# Altium PCB 12 array vscore.PcbDoc
Units mm, origin at the board's own origin, x right, y up, seen from the top; angles counter-clockwise.
Board outline 8.3 x 5.8 mm, 2 copper layers (Top Layer, Bottom Layer); 5 components, 2 nets, 50 pads, 50 vias.
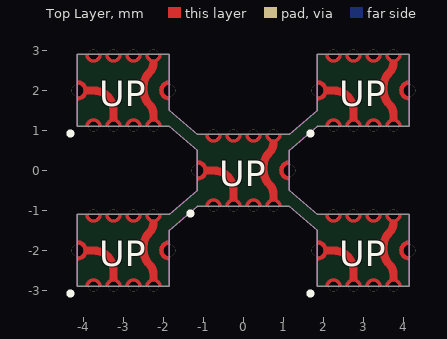
[diagram p0: Top Layer view]
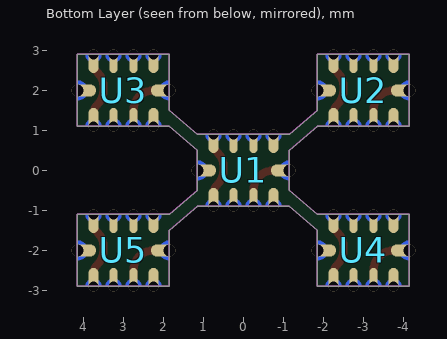
[diagram p1: Bottom Layer view, seen from below]

## Layer stack, top to bottom
Top Solder: solder mask 0.0102, Solder Resist, Dk 3.5
Top Layer: signal copper 0.0356
Dielectric 1: dielectric 0.32, FR-4, Dk 4.8
Bottom Layer: signal copper 0.0356
Bottom Solder: solder mask 0.0102, Solder Resist, Dk 3.5

## Board outline
-1.85,-2.9 -1.85,-1.5 -1.15,-0.9 1.15,-0.9 1.85,-1.5 1.85,-2.9 4.15,-2.9 4.15,-1.1 1.85,-1.1 1.15,-0.5 1.15,0.5 1.85,1.1 4.15,1.1 4.15,2.9 1.85,2.9 1.85,1.5 1.15,0.9 -1.15,0.9 -1.85,1.5 -1.85,2.9 -4.15,2.9 -4.15,1.1 -1.85,1.1 -1.15,0.5 -1.15,-0.5 -1.85,-1.1 -4.15,-1.1 -4.15,-2.9

## Design rules (kind name [scope] priority, off if disabled: settings)
Clearance [All] p1: gap=0.152 ignorepadtopadclearanceinfootprint=FALSE except(0: Arc-Hole Track-Hole SMDPad-Hole THPad-Hole Via-Hole Fill-Hole Poly-Hole Region-Hole Text-Hole)
MinimumSolderMaskSliver [All] p1 off: minsoldermaskwidth=0.254
PolygonConnect [All] p1: connectstyle=Direct reliefconductorwidth=0.254 reliefentries=4 polygonreliefangle="90 Angle" airgapwidth=0.254
RoutingVias [All] p1: holewidth=0.711 width=1.27 viastyle="Through Hole" minholewidth=0.2 minwidth=0.45 maxholewidth=0.711 maxwidth=1.27
SilkToSilkClearance [All] p1 off: silktosilkclearance=0.254
SilkToSolderMaskClearance [IsPad] p1 off: minsilkscreentomaskgap=0.254 clearancetoexposedcopper=TRUE
SolderMaskExpansion [All] p1: expansion=0.102 istentingtop=FALSE
Width [All] p1: maxlimit=5.08 minlimit=0.152 preferedwidth=0.254 minimp=50.000000 maximp=50.000000 favimp=50.000000
27 further rules are at their usual default settings.

## Components (designator, comment, footprint, x,y, rotation, side; value= is the part's Value field where it differs from the comment)
U1 "FAKE_ANALOG_SWITCH" SMTPCB-SPOOF-UFQFN-10 0,0 r90 top
U2 "FAKE_ANALOG_SWITCH" SMTPCB-SPOOF-UFQFN-10 -3,2 r90 top (schematic designator U1)
U3 "FAKE_ANALOG_SWITCH" SMTPCB-SPOOF-UFQFN-10 3,2 r90 top (schematic designator U1)
U4 "FAKE_ANALOG_SWITCH" SMTPCB-SPOOF-UFQFN-10 -3,-2 r90 top (schematic designator U1)
U5 "FAKE_ANALOG_SWITCH" SMTPCB-SPOOF-UFQFN-10 3,-2 r90 top (schematic designator U1)

## Footprints (in the part's own frame and the unit in brackets; to place one, negate y for a bottom-side part, rotate by r counter-clockwise, add the part's x,y. Pads: shape width x height; smd on the part's side, far side on the other; paste and mask are expansions set on the pad)
SMTPCB-SPOOF-UFQFN-10 [mm] "QFN, 10-Leads, Body 1.50x2.00mm, Pitch 0.50mm, IPC High Density"
  oval 0.58x0.25 smd far side: 1(-0.725,0.75) 4(-0.725,-0.75) 6(0.725,-0.75) 9(0.725,0.75)
  oval 0.58x0.2 smd far side: 2(-0.725,0.25) 3(-0.725,-0.25) 7(0.725,-0.25) 8(0.725,0.25)
  oval 0.3x0.58 smd far side: 5(0,-0.975) 10(0,0.975)
  Multi-Layer region: -0.25,-1.15 -0.15,-1.15 -0.139,-1.093 -0.106,-1.044 -0.057,-1.011 0,-1 0,-1 0.057,-1.011 0.106,-1.044 0.139,-1.093 0.15,-1.15 0.15,-1.15 0.25,-1.15 0.231,-1.054 0.177,-0.973 0.096,-0.919 0,-0.9 0,-0.9 -0.096,-0.919 -0.177,-0.973 -0.231,-1.054 -0.25,-1.15
  Multi-Layer region: 0.9,-0.05 0.9,-0.15 0.862,-0.158 0.829,-0.179 0.808,-0.212 0.8,-0.25 0.8,-0.25 0.808,-0.288 0.829,-0.321 0.862,-0.342 0.9,-0.35 0.9,-0.35 0.9,-0.45 0.823,-0.435 0.759,-0.391 0.715,-0.327 0.7,-0.25 0.7,-0.25 0.715,-0.173 0.759,-0.109 0.823,-0.065 0.9,-0.05
  Multi-Layer region: -0.9,0.95 -0.9,0.85 -0.862,0.842 -0.829,0.821 -0.808,0.788 -0.8,0.75 -0.8,0.75 -0.808,0.712 -0.829,0.679 -0.862,0.658 -0.9,0.65 -0.9,0.65 -0.9,0.55 -0.823,0.565 -0.759,0.609 -0.715,0.673 -0.7,0.75 -0.7,0.75 -0.715,0.827 -0.759,0.891 -0.823,0.935 -0.9,0.95
  Multi-Layer region: -0.9,0.45 -0.9,0.35 -0.862,0.342 -0.829,0.321 -0.808,0.288 -0.8,0.25 -0.8,0.25 -0.808,0.212 -0.829,0.179 -0.862,0.158 -0.9,0.15 -0.9,0.15 -0.9,0.05 -0.823,0.065 -0.759,0.109 -0.715,0.173 -0.7,0.25 -0.7,0.25 -0.715,0.327 -0.759,0.391 -0.823,0.435 -0.9,0.45
  Multi-Layer region: -0.9,-0.05 -0.9,-0.15 -0.862,-0.158 -0.829,-0.179 -0.808,-0.212 -0.8,-0.25 -0.8,-0.25 -0.808,-0.288 -0.829,-0.321 -0.862,-0.342 -0.9,-0.35 -0.9,-0.35 -0.9,-0.45 -0.823,-0.435 -0.759,-0.391 -0.715,-0.327 -0.7,-0.25 -0.7,-0.25 -0.715,-0.173 -0.759,-0.109 -0.823,-0.065 -0.9,-0.05
  Multi-Layer region: -0.9,-0.55 -0.9,-0.65 -0.862,-0.658 -0.829,-0.679 -0.808,-0.712 -0.8,-0.75 -0.8,-0.75 -0.808,-0.788 -0.829,-0.821 -0.862,-0.842 -0.9,-0.85 -0.9,-0.85 -0.9,-0.95 -0.823,-0.935 -0.759,-0.891 -0.715,-0.827 -0.7,-0.75 -0.7,-0.75 -0.715,-0.673 -0.759,-0.609 -0.823,-0.565 -0.9,-0.55
  Multi-Layer region: 0.25,1.15 0.15,1.15 0.139,1.093 0.106,1.044 0.057,1.011 0,1 0,1 -0.057,1.011 -0.106,1.044 -0.139,1.093 -0.15,1.15 -0.15,1.15 -0.25,1.15 -0.231,1.054 -0.177,0.973 -0.096,0.919 0,0.9 0,0.9 0.096,0.919 0.177,0.973 0.231,1.054 0.25,1.15
  Multi-Layer region: 0.9,0.95 0.9,0.85 0.862,0.842 0.829,0.821 0.808,0.788 0.8,0.75 0.8,0.75 0.808,0.712 0.829,0.679 0.862,0.658 0.9,0.65 0.9,0.65 0.9,0.55 0.823,0.565 0.759,0.609 0.715,0.673 0.7,0.75 0.7,0.75 0.715,0.827 0.759,0.891 0.823,0.935 0.9,0.95
  Multi-Layer region: 0.9,0.45 0.9,0.35 0.862,0.342 0.829,0.321 0.808,0.288 0.8,0.25 0.8,0.25 0.808,0.212 0.829,0.179 0.862,0.158 0.9,0.15 0.9,0.15 0.9,0.05 0.823,0.065 0.759,0.109 0.715,0.173 0.7,0.25 0.7,0.25 0.715,0.327 0.759,0.391 0.823,0.435 0.9,0.45
  Multi-Layer region: 0.9,-0.55 0.9,-0.65 0.862,-0.658 0.829,-0.679 0.808,-0.712 0.8,-0.75 0.8,-0.75 0.808,-0.788 0.829,-0.821 0.862,-0.842 0.9,-0.85 0.9,-0.85 0.9,-0.95 0.823,-0.935 0.759,-0.891 0.715,-0.827 0.7,-0.75 0.7,-0.75 0.715,-0.673 0.759,-0.609 0.823,-0.565 0.9,-0.55
  silkscreen extent -1.12,1.27 -1.03,1.37

## Part data
U1 U2 U3 U4 U5: "I MADE A BAD DESIGN CHOICE AND HAVE TO LIVE WITH IT NOW"

## Via types
v1: diameter 0.25, hole 0.25, Top Layer to Bottom Layer, 40 vias
v2: diameter 0.3, hole 0.3, Top Layer to Bottom Layer, 10 vias

## Nets (pads, with @x,y where several pads share a name; then routed paths per layer and width w, separated by ;. In a path a pad name is that pad's centre, name@x,y a point inside that pad or via, vN(x,y) a via of type N, cw(c..) or ccw(c..) an arc to the next point about the centre after c; other vN are vias at no path point)
NetU1_2: 
NetU1_4: 
pads on no net: U1.1 U1.2 U1.3 U1.4 U1.5 U1.6 U1.7 U1.8 U1.9 U1.10 U2.1 U2.2 U2.3 U2.4 U2.5 U2.6 U2.7 U2.8 U2.9 U2.10 U3.1 U3.2 U3.3 U3.4 U3.5 U3.6 U3.7 U3.8 U3.9 U3.10 U4.1 U4.2 U4.3 U4.4 U4.5 U4.6 U4.7 U4.8 U4.9 U4.10 U5.1 U5.2 U5.3 U5.4 U5.5 U5.6 U5.7 U5.8 U5.9 U5.10
copper on no net: | length 17.6
  Top Layer w0.203: v2(-4.15,-2) -3.75,-2 cw(c-3.75,-2.5) -3.25,-2.5 v1(-3.25,-2.9) ; v2(-4.15,2) -3.75,2 cw(c-3.75,1.5) -3.25,1.5 v1(-3.25,1.1) ; v1(-2.25,-2.9) -2.25,-2.591 ccw(c-2.591,-2.591) -2.35,-2.35 cw(c-1.988,-1.988) -2.5,-1.988 -2.5,-1.9 cw(c-2.017,-1.9) -2.359,-1.559 -2.35,-1.55 ccw(c-2.591,-1.309) -2.25,-1.309 v1(-2.25,-1.1) ; v1(-2.25,1.1) -2.25,1.409 ccw(c-2.591,1.409) -2.35,1.65 cw(c-1.988,2.012) -2.5,2.012 -2.5,2.1 cw(c-2.017,2.1) -2.359,2.441 -2.35,2.45 ccw(c-2.591,2.691) -2.25,2.691 v1(-2.25,2.9) ; v2(-1.15,0) -0.75,0 cw(c-0.75,-0.5) -0.25,-0.5 v1(-0.25,-0.9) ; v1(0.75,-0.9) 0.75,-0.591 ccw(c0.409,-0.591) 0.65,-0.35 cw(c1.012,0.012) 0.5,0.012 0.5,0.1 cw(c0.983,0.1) 0.641,0.441 0.65,0.45 ccw(c0.409,0.691) 0.75,0.691 v1(0.75,0.9) ; v2(1.85,-2) 2.25,-2 cw(c2.25,-2.5) 2.75,-2.5 v1(2.75,-2.9) ; v2(1.85,2) 2.25,2 cw(c2.25,1.5) 2.75,1.5 v1(2.75,1.1) ; v1(3.75,-2.9) 3.75,-2.591 ccw(c3.409,-2.591) 3.65,-2.35 cw(c4.012,-1.988) 3.5,-1.988 3.5,-1.9 cw(c3.983,-1.9) 3.641,-1.559 3.65,-1.55 ccw(c3.409,-1.309) 3.75,-1.309 v1(3.75,-1.1) ; v1(3.75,1.1) 3.75,1.409 ccw(c3.409,1.409) 3.65,1.65 cw(c4.012,2.012) 3.5,2.012 3.5,2.1 cw(c3.983,2.1) 3.641,2.441 3.65,2.45 ccw(c3.409,2.691) 3.75,2.691 v1(3.75,2.9)
  other v1: -3.75,-2.9 -2.75,-2.9 2.25,-2.9 3.25,-2.9 -3.75,-1.1 -3.25,-1.1 -2.75,-1.1 2.25,-1.1 2.75,-1.1 3.25,-1.1 -0.75,-0.9 0.25,-0.9 -0.75,0.9 -0.25,0.9 0.25,0.9 -3.75,1.1 -2.75,1.1 2.25,1.1 3.25,1.1 -3.75,2.9 -3.25,2.9 -2.75,2.9 2.25,2.9 2.75,2.9 3.25,2.9
  other v2: -1.85,-2 4.15,-2 1.15,0 -1.85,2 4.15,2

## Keep-outs
Keep-Out Layer:
  the board outline again, w0.025

## Silkscreen, mask and mechanical layers (free items; w line width, h text height)
Top Overlay:
  text "UP" at -3.6,1.6 h0.64
  text "UP" at 2.4,1.6 h0.64
  text "UP" at -0.6,-0.4 h0.64
  text "UP" at -3.6,-2.4 h0.64
  text "UP" at 2.4,-2.4 h0.64